# Altium PCB MSP432P401R_v1.0.PcbDoc
Units mil, origin at the board's own origin, x right, y up, seen from the top; angles counter-clockwise.
Board outline 3897.01 x 3280.59 mil, 2 copper layers (Top Layer, Bottom Layer); 47 components, 52 nets, 202 pads, 150 vias.
Unrouted connection lines stored in the file: 6.
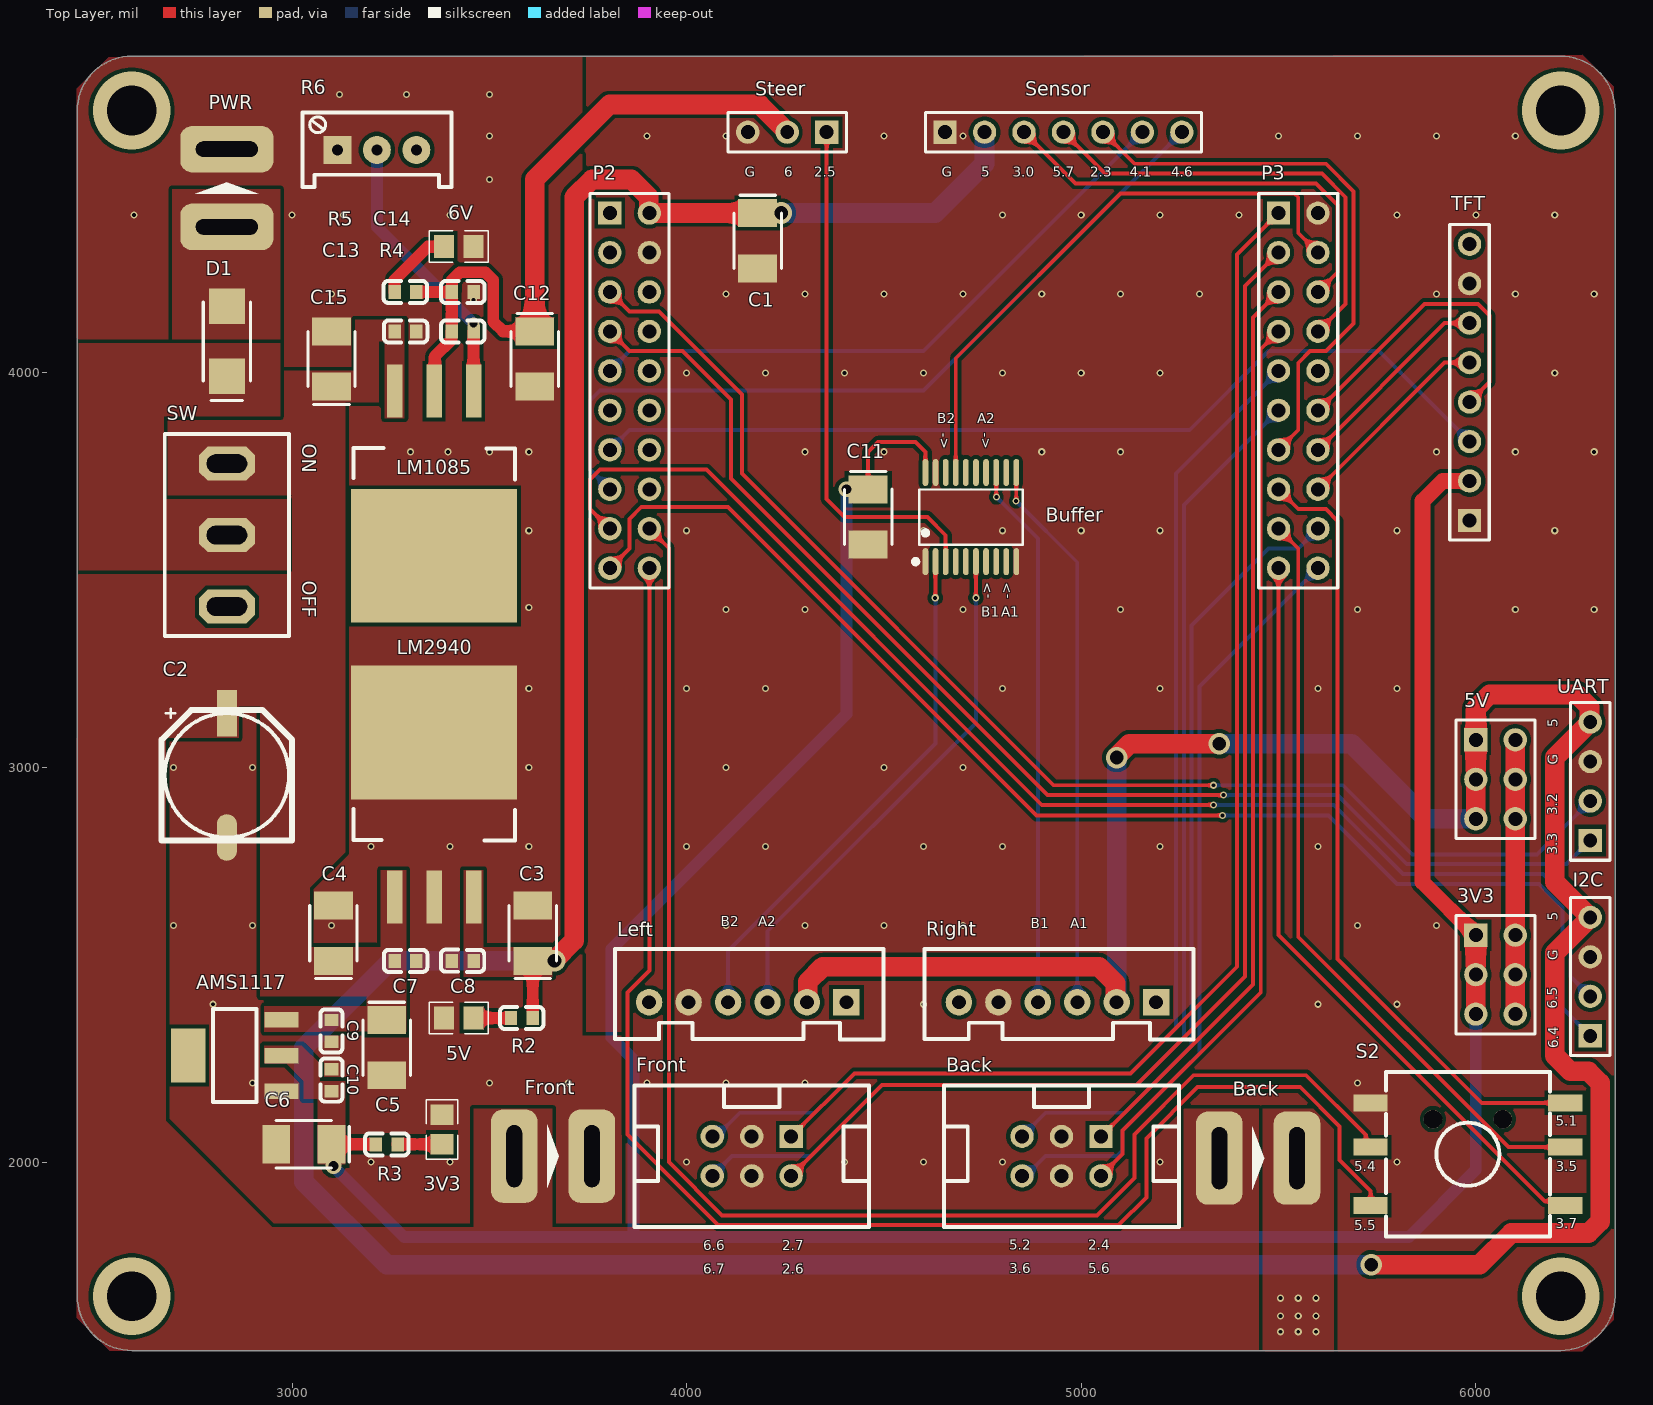
[diagram p0: Top Layer view]
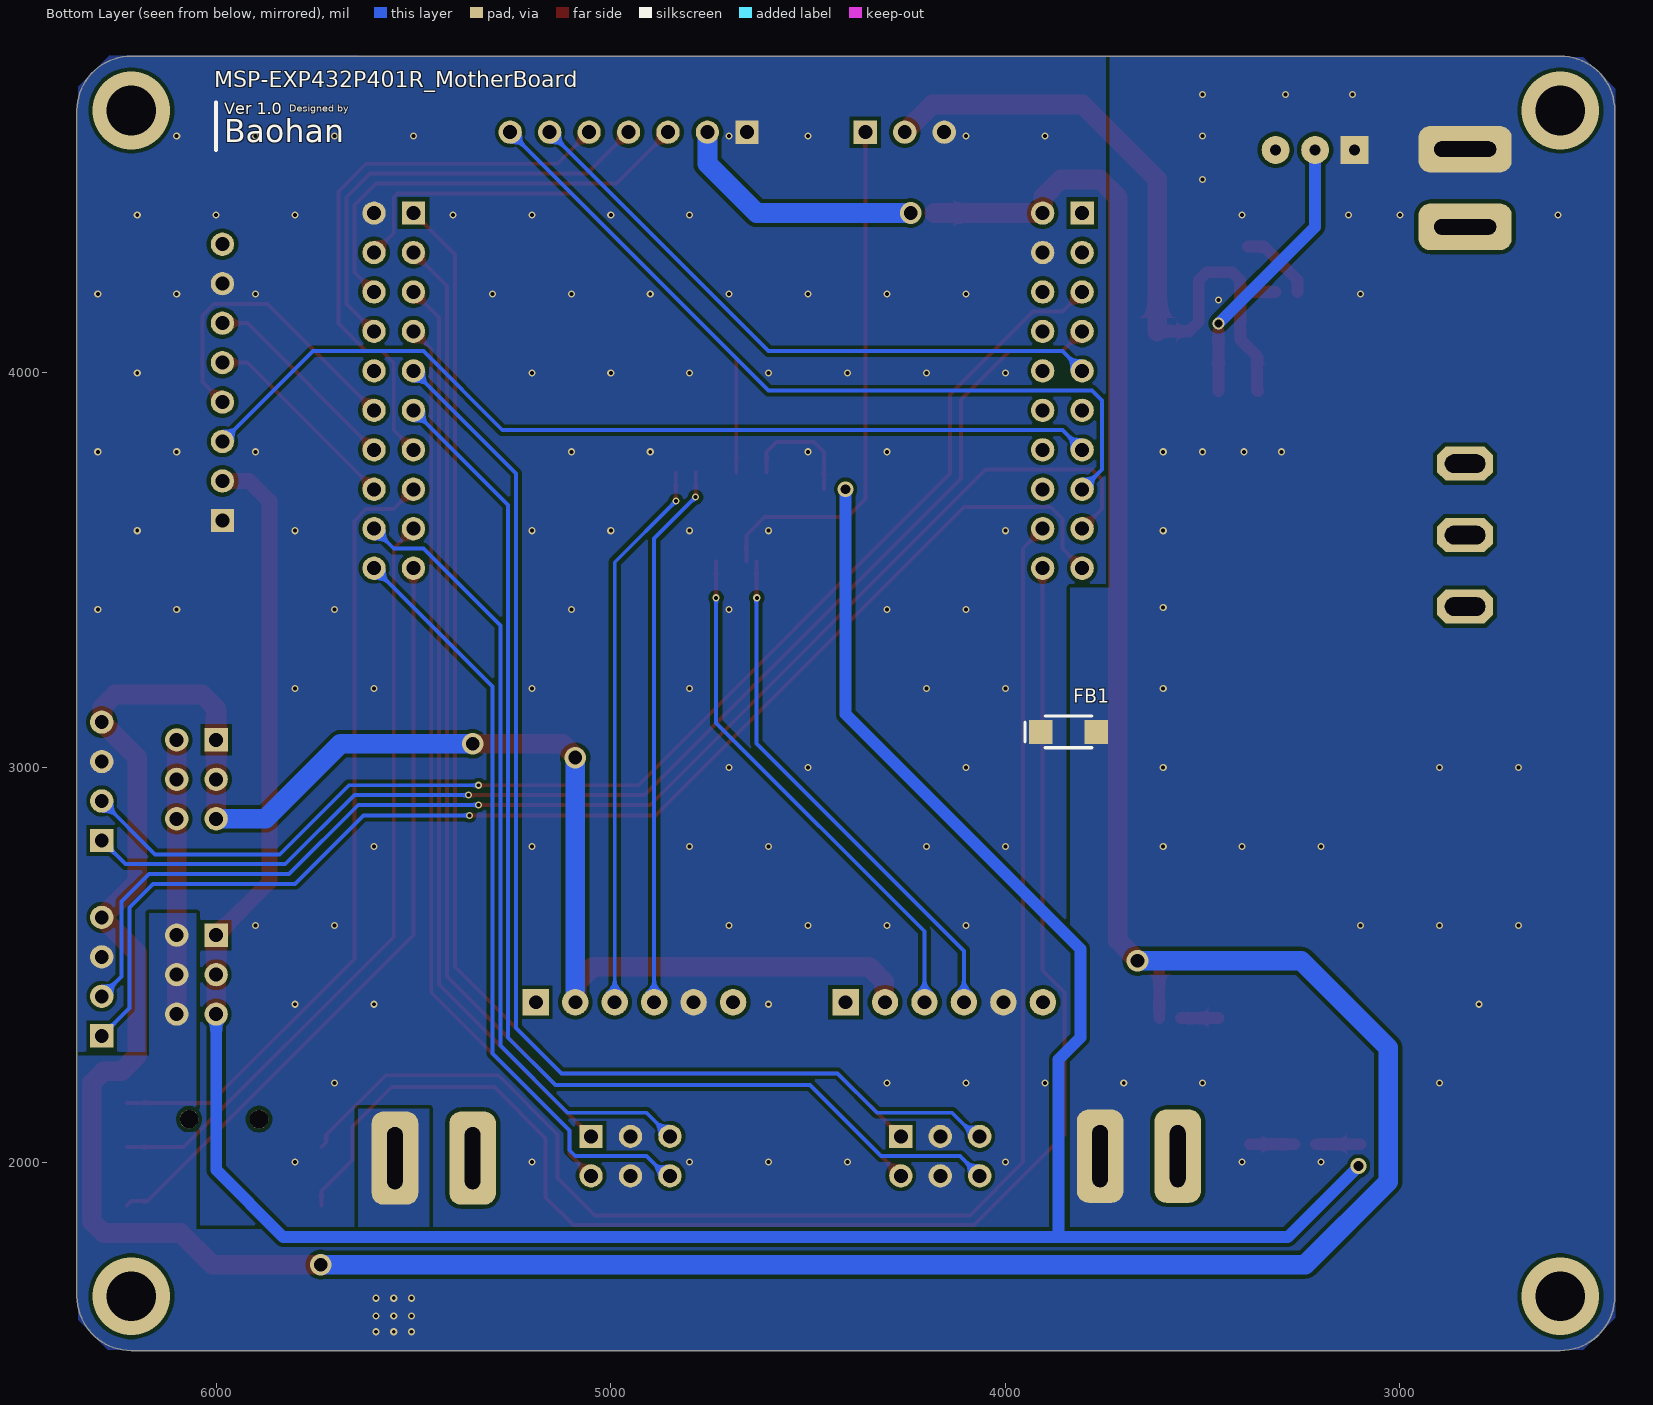
[diagram p1: Bottom Layer view, seen from below]

## Layer stack, top to bottom
Top Solder: solder mask 0.4, Solder Resist, Dk 3.5
Top Layer: signal copper 1.4
Dielectric 1: dielectric 12.6, FR-4, Dk 4.8
Bottom Layer: signal copper 1.4
Bottom Solder: solder mask 0.4, Solder Resist, Dk 3.5

## Board outline
2455.79,1660 ccw(c2593.58,1660) 2593.58,1522.2 6215,1522.2 ccw(c6215,1660) 6352.79,1660 6352.8,4665 ccw(c6215,4665) 6215,4802.8 2593.58,4802.8 ccw(c2593.58,4665) 2455.79,4665

## Design rules (kind name [scope] priority, off if disabled: settings)
Clearance [All] p1: gap=7 ignorepadtopadclearanceinfootprint=TRUE except(0: Arc-Hole Track-Hole SMDPad-Hole THPad-Hole Via-Hole Fill-Hole Poly-Hole Region-Hole Text-Hole; 10: Arc-Poly Track-Poly SMDPad-Poly THPad-Poly Via-Poly Fill-Poly Poly-Poly)
ComponentClearance [All] p1: gap=0 collisioncheckmode=3 verticalgap=0 showdistances=FALSE
HoleSize [All] p1: absolutevalues=TRUE maxlimit=10000 minlimit=8 maxpercent=80.000 minpercent=20.000
MinimumSolderMaskSliver [All] p1: minsoldermaskwidth=2
PlaneClearance [All] p1: clearance=8
PolygonConnect [All] p1: connectstyle=Direct reliefconductorwidth=10 reliefentries=4 polygonreliefangle="90 Angle" airgapwidth=10
RoutingVias [All] p1: holewidth=12 width=24 viastyle="Through Hole" minholewidth=12 minwidth=24 maxholewidth=12 maxwidth=24
ShortCircuit [All] p1 off: allowed=FALSE
SilkToSilkClearance [All] p1: silktosilkclearance=0
SilkToSolderMaskClearance [IsPad] p1: minsilkscreentomaskgap=0 clearancetoexposedcopper=TRUE
SolderMaskExpansion [All] p1: expansion=4 istentingtop=FALSE
Width VCC [InNetClass('VCC')] p1: maxlimit=160 minlimit=25 preferedwidth=30 minimp=50.000000 maximp=50.000000 favimp=50.000000
Width SIGN [InNetClass('SIGN')] p2: maxlimit=50 minlimit=5 preferedwidth=10 minimp=50.000000 maximp=50.000000 favimp=50.000000
23 further rules are at their usual default settings.

## Classes and differential pairs
component class Sheet1: 3V3 5V 6V AMS1117 Back Buffer C1 C2 C3 C4 C5 C6 C7 C8 C9 C10 C11 C12 C13 C14 C15 D1 FB1 Front I2C Left LM1085 LM2940 P2 P3 PWR R2 R3 R4 R5 R6 Right S2 SENSOR Steer SW TFT UART

## Components (designator, comment, footprint, x,y, rotation, side; value= is the part's Value field where it differs from the comment)
3V3 "LED" 0805 3380,2082.4 r90 top (schematic designator LED2)
3V3 "Header 3X2" HDR2X3 6000,2575 r270 top (schematic designator 2)
5V "LED" 0805 3422.6,2365 r180 top (schematic designator LED1)
5V "Header 3X2" HDR2X3 6000,3070 r270 top (schematic designator 1)
6V "LED" 0805 3422.4,4320 r0 top (schematic designator LED3)
AMS1117 "AMS117-3V3" SOT-223 2855,2270 r0 top (schematic designator U1)
Back "MOTOR" VCC_CON 5448.43,2010 r0 top (schematic designator P6)
Back "Header 3X2" 2x3牛角座 4950,2015 r0 top (schematic designator L1)
Buffer "Buffer" TSSOP_20 4720,3635 r0 top (schematic designator Buffer1)
C1 "25V" CAP-3528 4180,4335 r270 top value=10uF
C2 "Cap Pol" "CE E(8*10.2)" 2835,2980 r90 top value=470uF
C3 "Cap Pol2" CAP-3528 3610,2580 r90 top value=100uF
C4 "Cap Pol2" CAP-3528 3105,2580 r90 top value=100uF
C5 "Cap Pol2" CAP-3528 3240,2290 r270 top value=100uF
C6 "Cap Pol2" CAP-3528 3030,2045 r180 top value=100uF
C7 "Cap" CAP-0603 3287.55,2510 r180 top value=0.1uF
C8 "Cap" CAP-0603 3432.45,2510 r0 top value=0.1uF
C9 "Cap" CAP-0603 3100,2332.45 r90 top value=0.1uF
C10 "Cap" CAP-0603 3100,2207.55 r270 top value=0.1uF
C11 "25V" CAP-3528 4460,3635 r270 top value=10uF
C12 "Cap Pol2" CAP-3528 3615,4035 r270 top value=10uF
C13 "Cap" CAP-0603 3287.55,4105 r180 top value=0.1uF
C14 "Cap" CAP-0603 3432.55,4205 r180 top value=0.1uF
C15 "Cap Pol2" CAP-3528 3100,4035 r90 top value=10uF
D1 "D Schottky" DIODE-SMA 2835,4080 r270 top
FB1 "0R" CAP-1206 3840,3090 r180 bottom
Front "MOTOR" VCC_CON 3661.57,2015 r0 top (schematic designator P1)
Front "Header 3X2" 2x3牛角座 4165,2015 r0 top (schematic designator R1)
I2C "I2C" HDR1X4 6290,2320 r90 top (schematic designator AG1)
Left "Header 6" XH2.54-LI-6P 4155,2405 r180 top (schematic designator LEFT1)
LM1085 "LM1085" LM2940-5.0 3360,3745 r270 top (schematic designator U3)
LM2940 "LM2940-5V" LM2940-5.0 3360,2880 r90 top (schematic designator U2)
P2 "Header 10X2" HDR2X10 3805.51,4405 r270 top
P3 "Header 10X2" HDR2X10 5500,4405 r270 top
PWR "PWR" VCC_CON 2835,4468.43 r90 top (schematic designator P4)
R2 "Res2" RES_0603 3582.45,2365 r0 top value=5.1K
R3 "Res2" RES_0603 3240,2045 r180 top value=3K
R4 "330R" RES_0603 3432.44,4105 r180 top value=1K
R5 "Res2" RES_0603 3287.45,4205 r0 top value=5.1K
R6 "10K" 3296W 3215,4565 r0 top value=1K
Right "Header 6" XH2.54-LI-6P 4940,2405 r180 top (schematic designator RIGHT1)
S2 "五向开关" 五向按键（贴片） 5980,2020 r0 top
Sensor "Header 7" HDR1X7 4655,4610 r0 top (schematic designator P5)
Steer "舵机" HDR1X3 4355,4610 r180 top (schematic designator Steer1)
SW "SW-3-3" SWITCH-3-3 2835,3588.9 r270 top (schematic designator S1)
TFT "Component_1" HDR1X8 5984.06,3626.02 r90 top (schematic designator TFT1)
UART "UART" HDR1X4 6290,2815 r90 top (schematic designator CAM1)

## Footprints (in the part's own frame and the unit in brackets; to place one, negate y for a bottom-side part, rotate by r counter-clockwise, add the part's x,y. Pads: shape width x height; smd on the part's side, far side on the other; paste and mask are expansions set on the pad)
2x3牛角座 [mm]
  rect 1.5x1.5 hole 0.9: 1(2.54,1.27)
  round 1.5 hole 0.9: 2(2.54,-1.27) 3(0,1.27) 4(0,-1.27) 5(-2.54,1.27) 6(-2.54,-1.27)
  silkscreen extent -7.56,-4.55 7.56,4.55
0805 [mm] "贴片带丝印"
  rect 1.3x1.5 smd: 1(-0.95,0) 2(0.95,0)
  silkscreen extent -1.9,-1.02 1.91,1.02, body extent -1.14,-0.51 1.14,0.51, height 1
3296W [mm] "Precise Multi-Winding Adjustable Resistor"
  rect 1.8x1.8 hole 0.7: 1(-2.54,0)
  round 1.8 hole 0.7: 2(0,0) 3(2.54,0)
  silkscreen extent -4.8,-2.4 4.8,2.4, body extent -4.75,-2.4 4.75,2.4, height 2.9
CAP-0603 [mm] "0603封装电容"
  rect 0.8x0.9 smd: 1(-0.7,0) 2(0.7,0)
  silkscreen extent -1.41,-0.71 1.39,0.72, body extent -0.8,-0.41 0.8,0.41, height 0.84
CAP-1206 [mil]
  rect 60x60 smd: 1(-70,0) 2(70,0)
  silkscreen extent -110,-40 60,40, body extent -65,-35 65,35, height 39
CAP-3528 [mm]
  rect 1.8x2.5 smd: 1(-1.778,0) 2(1.778,0)
  silkscreen extent -2.92,-1.52 1.78,1.52, body extent -1.91,-1.4 1.91,1.4, height 1.1
"CE E(8*10.2)" [mm] "贴片电解电容，直径8mm，高10.2mm"
  rect 3x1.3 smd: 1(4,0)
  oval 3x1.3 smd: 2(-4,0)
  silkscreen extent -4.2,-4.2 4.3,4.2, body extent -4.5,-4.15 4.5,4.15, height 10.25
DIODE-SMA [mm]
  rect 2.3x2.3 smd: 1(-2.25,0) 2(2.25,0)
  silkscreen extent -2.54,-1.52 3.81,1.52, body extent -2.92,-1.4 2.92,1.4, height 3
HDR1X3 [mm] "Connector; Header; 3 Position"
  rect 1.5x1.5 hole 0.9: 1(0,0)
  round 1.5 hole 0.9: 2(2.54,0) 3(5.08,0)
  silkscreen extent -1.27,-1.27 6.35,1.27
HDR1X4 [mm] "Connector; Header; 4 Position"
  rect 1.5x1.5 hole 0.9: 1(0,0)
  round 1.5 hole 0.9: 2(2.54,0) 3(5.08,0) 4(7.62,0)
  silkscreen extent -1.27,-1.27 8.89,1.27
HDR1X7 [mm] "Connector; Header; 7 Position"
  rect 1.5x1.5 hole 0.9: 1(0,0)
  round 1.5 hole 0.9: 2(2.54,0) 3(5.08,0) 4(7.62,0) 5(10.16,0) 6(12.7,0) 7(15.24,0)
  silkscreen extent -1.27,-1.27 16.51,1.27
HDR1X8 [mm] "Connector; Header; 8 Position"
  rect 1.5x1.5 hole 0.9: 1(0,0)
  round 1.5 hole 0.9: 2(2.54,0) 3(5.08,0) 4(7.62,0) 5(10.16,0) 6(12.7,0) 7(15.24,0) 8(17.78,0)
  silkscreen extent -1.27,-1.27 19.05,1.27
HDR2X3 [mm] "Connector; Header; 3x2 Position"
  rect 1.5x1.5 hole 0.9: 1(0,0)
  round 1.5 hole 0.9: 2(0,2.54) 3(2.54,0) 4(2.54,2.54) 5(5.08,0) 6(5.08,2.54)
  silkscreen extent -1.27,-1.27 6.35,3.81
HDR2X10 [mm] "Connector; Header; 10x2 Position"
  rect 1.5x1.5 hole 0.9: 1(0,0)
  round 1.5 hole 0.9: 2(0,2.54) 3(2.54,0) 4(2.54,2.54) 5(5.08,0) 6(5.08,2.54) 7(7.62,0) 8(7.62,2.54) 9(10.16,0) 10(10.16,2.54) 11(12.7,0) 12(12.7,2.54) 13(15.24,0) 14(15.24,2.54) 15(17.78,0) 16(17.78,2.54) 17(20.32,0) 18(20.32,2.54) 19(22.86,0) 20(22.86,2.54)
  silkscreen extent -1.27,-1.27 24.13,3.81
LM2940-5.0 [mm]
  rect 3.4x1 smd: 1(-5.3,2.54) 2(-5.3,0) 3(-5.3,-2.54)
  rect 8.6x10.7 smd: 4(5.3,0)
  silkscreen extent -1.64,-5.2 0.38,5.2
RES_0603 [mm] "0603封装电阻"
  rect 0.8x0.9 smd: 1(-0.7,0) 2(0.7,0)
  silkscreen extent -1.41,-0.71 1.39,0.72, body extent -0.8,-0.4 0.8,0.4, height 0.45
SOT-223 [mm]
  rect 2.2x1 smd: 1(3,-2.3) 2(3,0) 3(3,2.3)
  rect 2.2x3.5 smd: 4(-3,0)
  silkscreen extent -1.4,-3 1.4,3, body extent -2.54,-2.54 2.54,2.54, height 1.27
SWITCH-3-3 [mm]
  oct 2.2x3.6 hole 1.2 slot 2.6 at 90 deg: 1(-4.6,0) 2(0,0) 3(4.6,0)
  silkscreen extent -6.5,-4 6.5,4
TSSOP_20 [mil]
  oval 14.33x68.58 smd mask+2: 1(-114.71,-113.42) 2(-89.12,-113.42) 3(-63.53,-113.42) 4(-37.94,-113.42) 5(-12.34,-113.42) 6(13.25,-113.42) 7(38.84,-113.42) 8(64.43,-113.42) 9(90.02,-113.42) 10(115.61,-113.42) 11(115.61,112.64) 12(90.02,112.64) 13(64.43,112.64) 14(38.84,112.64) 15(13.25,112.64) 16(-12.34,112.64) 17(-37.94,112.64) 18(-63.53,112.64) 19(-89.12,112.64) 20(-114.71,112.64)
  silkscreen extent -146,-119 131,69
VCC_CON [mm] "供电接口"
  rrect50% 3x6 hole 4 slot 1 at 0 deg: 1(-2.5,0) 2(2.5,0)
  silkscreen extent -0.38,-2.03 0.38,2.03
XH2.54-LI-6P [mm] "接插件，6P"
  rect 1.7x1.7 hole 0.9: 1(-6.35,0)
  round 1.7 hole 0.9: 2(-3.81,0) 3(-1.27,0) 4(1.27,0) 5(3.81,0) 6(6.35,0)
  silkscreen extent -8.74,-3.43 8.56,2.39, body extent -8.85,-3.3 8.85,2.4, height 7.05
五向按键（贴片） [mm] "6脚，长：10.5，宽：10，高：9mm"
  round 1.2 hole 1.2: 0(-2.25,2.25) 0(2.25,2.25)
  rect 2.2x1.1 smd: 1(-6.262,3.3) 2(-6.262,0.45) 3(-6.262,-3.3) 4(6.262,-3.3) 5(6.262,0.45) 6(6.262,3.3)
  silkscreen extent -5.29,-5.29 5.29,5.29, body extent -6.5,-5.16 6.5,5.16, height 0.15

## Part data
3V3 5V 6V: library part LED0, "Typical INFRARED GaAs LED", LatestRevisionDate=08-Jul-2005, LatestRevisionNote="Mech Layer 1 removed.", PackageDescription="LED; 2 Leads", PackageReference=LED-0, Published=8-Jun-2000, Publisher="Altium Limited"
3V3 5V Back Front: "Header, 3-Pin, Dual row", LatestRevisionDate=17-Jul-2002, LatestRevisionNote="Re-released for DXP Platform.", Publisher="Altium Limited"
AMS1117: library part AMS1117-3V3
Back Front PWR: library part "Header 2H", "Header, 2-Pin, Right Angle", LatestRevisionDate=17-Jul-2002, LatestRevisionNote="Re-released for DXP Platform.", Publisher="Altium Limited"
C1 C11: library part "Cap Pol2", "Polarized Capacitor (Axial)", LatestRevisionDate=17-Jul-2002, LatestRevisionNote="Re-released for DXP Platform.", PackageDescription="Polarized Capacitor; 2 Leads", PackageReference=POLAR0.8, Published=8-Jun-2000, Publisher="Altium Limited"
C2: "极性电解电容", LatestRevisionDate=17-Jul-2002, LatestRevisionNote="Re-released for DXP Platform.", PackageReference=RB7.6-15, Published=8-Jun-2000, Publisher="Altium Limited", Vol=16V
C3 C4 C5 C6 C12 C15: "Polarized Capacitor (Axial)", LatestRevisionDate=17-Jul-2002, LatestRevisionNote="Re-released for DXP Platform.", PackageDescription="Polarized Capacitor; 2 Leads", PackageReference=POLAR0.8, Published=8-Jun-2000, Publisher="Altium Limited"
C7 C8 C9 C10 C13 C14: "Capacitor", LatestRevisionDate=17-Jul-2002, LatestRevisionNote="Re-released for DXP Platform.", PackageDescription="Radial Cap, Thru-Hole; 2 Leads; 0.3 in Pin Spacing", PackageReference=RAD-0.3, Published=8-Jun-2000, Publisher="Altium Limited"
D1: "Schottky Diode", Code_JEDEC=DO-214-AA, LatestRevisionDate=17-Jul-2002, LatestRevisionNote="Re-released for DXP Platform.", PackageDescription="DO-214-AA/SMB; 2 C-Bend Leads; Body 5.3 x 3.6 mm, inc. leads (LxW)", PackageReference=SMB, Published=8-Jun-2000, Publisher="Altium Limited"
FB1: library part "Inductor Isolated", "Inductor Isolated六孔磁珠"
I2C: library part 12C
Left Right: "Header, 6-Pin", LatestRevisionDate=17-Jul-2002, LatestRevisionNote="Re-released for DXP Platform.", Publisher="Altium Limited"
LM2940: library part LM2940
P2 P3: "Header, 10-Pin, Dual row", LatestRevisionDate=17-Jul-2002, LatestRevisionNote="Re-released for DXP Platform.", Publisher="Altium Limited"
R2 R3 R5: "Resistor", LatestRevisionDate=17-Jul-2002, LatestRevisionNote="Re-released for DXP Platform.", PackageDescription="Axial Device, Thru-Hole; 2 Leads; 0.4 in Pin Spacing", PackageReference=AXIAL-0.4, Published=8-Jun-2000, Publisher="Altium Limited"
R4: library part Res2, "Resistor", LatestRevisionDate=17-Jul-2002, LatestRevisionNote="Re-released for DXP Platform.", PackageDescription="Axial Device, Thru-Hole; 2 Leads; 0.4 in Pin Spacing", PackageReference=AXIAL-0.4, Published=8-Jun-2000, Publisher="Altium Limited"
R6: library part "Res Adj2", "Variable Resistor", LatestRevisionDate=17-Jul-2002, LatestRevisionNote="Re-released for DXP Platform.", PackageDescription="Axial Device, Thru-Hole; 2 Leads; 0.6 in Pin Spacing", PackageReference=AXIAL-0.6, Published=8-Jun-2000, Publisher="Altium Limited", Set Position=0.5
Sensor: "Header, 7-Pin", LatestRevisionDate=17-Jul-2002, LatestRevisionNote="Re-released for DXP Platform.", Publisher="Altium Limited"
SW: library part SW-SPDT, "SPDT Subminiature Toggle Switch, Right Angle Mounting, Vertical Actuation", ComponentLink1Description="Manufacturer Link", ComponentLink1URL=http://www.apem.com, DatasheetVersion=05-Dec-2000, LatestRevisionDate=17-Dec-2003, LatestRevisionNote="Schematic revised, PCB Footprint replaced.", PackageDescription="Switch; 4 Leads", PackageReference=TL36WW15050, Published=24-Mar-1999, Publisher="Altium Limited"

## Via types
v1: diameter 18, hole 10, Top Layer to Bottom Layer, 138 vias
v2: diameter 55, hole 35, Top Layer to Bottom Layer, 5 vias
v3: diameter 196.85, hole 125.98, Top Layer to Bottom Layer, 4 vias
v4: diameter 40, hole 25, Top Layer to Bottom Layer, 2 vias
v5: diameter 30, hole 20, Top Layer to Bottom Layer, 1 vias

## Nets (pads, with @x,y where several pads share a name; then routed paths per layer and width w, separated by ;. In a path a pad name is that pad's centre, name@x,y a point inside that pad or via, vN(x,y) a via of type N, cw(c..) or ccw(c..) an arc to the next point about the centre after c; other vN are vias at no path point)
3V3: 3V3.1@6000,2575 3V3.3 3V3.5 AMS1117.2 Buffer.20 C6.1 C10.2 C11.1 R3.2 TFT.2 | length 7518.4
  Top Layer w10: C11.1 4460,3800 4485,3825 4580,3825 4605.29,3799.71 Buffer.20
  Top Layer w30: C6.1 R3.2
  Top Layer w40: TFT.2 5916.02,3726.02 5865,3675 5865,2710 3V3.1@6000,2575
  Top Layer w50: 3V3.5 3V3.3 3V3.1@6000,2575
  Bottom Layer w30: v4(3105,1990) 3285,1810 5830,1810 6000,1980 3V3.5 ; 3865,1812.57 3865,2260 3810,2315 3810,2540 4405,3135 v4(4405,3705)
5V: 5V.1@6000,3070 5V.3 5V.5 C1.1 C3.1 C8.2 I2C.4 Left.2 LM2940.3 P2.2 R2.2 Right.2 Sensor.2 UART.4 | length 12399.6
  Top Layer w30: R2.2 C3.1
  Top Layer w50: v2(3665,2510) 3665,2511.35 3715,2561.35 3715,4445 3760,4490 3860,4490 3903.78,4446.22 3903.78,4406.73 P2.2 C1.1 ; Left.2 4306.7,2406.7 4306.7,2456.7 4345,2495 5045,2495 5086.76,2453.24 5086.76,2408.24 Right.2 ; v2(5090,3025) 5090,3027.82 5122.18,3060 v2(5350,3060) ; v2(5735,1740) 6010,1740 6090,1820 6285.71,1820 6315,1849.29 6315,2200.71 6285.71,2230 6240,2230 6200,2270 6200,2530 I2C.4 6200,2710 6200,3025 UART.4 6288.27,3116.73 6288.27,3152.92 6256.18,3185 6035,3185 6000.06,3150.06 6000.06,3074.53 6000,3074.47 5V.3 5V.5
  Bottom Layer w50: v2(3665,2510) 3250,2510 3030,2290 3030,1950 3240,1740 v2(5735,1740) ; v2(4240,4405) 4630,4405 4755,4530 Sensor.2 ; Right.2 v2(5090,3025) ; v2(5350,3060) 5685,3060 5875,2870 5V.5
6V: C12.1 C14.2 LM1085.2 R4.2 R5.2 Steer.2 | length 1864.6
  Top Layer w30: R5.2 C14.2 ; LM1085.2 3361.96,3955.62 3361.96,4041.96 3404.14,4084.14 3404.14,4104.25 3405,4105.11 C14.2 ; C12.1 3535,4105 3510,4130 3510,4235 3490,4255 3425,4255 3405.75,4235.75 3405.75,4205.75 C14.2
  Top Layer w50: C12.1 3615,4490 3805,4680 4185,4680 Steer.2
7V2: AMS1117.3 Back.1@5350,2010 C2.1 C4.1 C5.1 C7.2 C9.2 C13.2 C15.1 Front.1@3563.15,2015 LM1085.3 LM2940.1 SW.1
A1: Buffer.11 Right.3 | length 1406.2
  Top Layer w10: v1(4835,3675) 4835.3,3675.3 4835.3,3747.33 Buffer.11
  Bottom Layer w10: v1@4835.61,3674.39 4990,3520 Right.3
A2: Buffer.6 Left.3 | length 1335.4
  Top Layer w10: v1(4733.25,3430) Buffer.6
  Bottom Layer w10: Left.3 4205,2585 4733.25,3113.25 v1(4733.25,3430)
B1: Buffer.13 Right.4 | length 1387.2
  Top Layer w10: Buffer.13 4784.71,3747.35 4784.71,3685.29 v1(4785,3685)
  Bottom Layer w10: v1@4784.43,3685.57 v1(4785,3685) 4890,3580 Right.4
B2: Buffer.2 Left.4 | length 1334.8
  Top Layer w10: v1(4630,3430) 4630.44,3430.44 4630.44,3521.14 Buffer.2
  Bottom Layer w10: Left.4 4105,2535 4630.88,3060.88 v1@4630.88,3430
BATGND: 3V3.2 3V3.4 3V3.6 5V.2 5V.4 5V.6 6V.2 AMS1117.1 Back.2@5546.85,2010 C2.2 C3.2 C4.2 C5.2 C6.2 C7.1 C8.1 C9.1 C10.1 C12.2 C13.1 C14.1 C15.2 FB1.2 Front.2@3760,2015 LM2940.2 LM2940.4 PWR.2 R6.1 | length 695
  Top Layer w50: 3V3.6 3V3.4 6100,2575 5V.6 5V.4 5V.2@6100,3070
  other v1: 5505,1570 5550,1570 5595,1570 5505,1610 5550,1610 5595,1610 5505,1655 5550,1655 5595,1655 3200,2000 3400,2000 2900,2200 3500,2200 3700,2200 2800,2400 2700,2600 2900,2600 3100,2600 3200,2800 3400,2800 3600,2800 2700,3000 2900,3000 3600,3000 3600,3200 3600,3405 3600,3600 3300,3800 3395,3800 3500,3800 3600,3800 3460,4185 3100,4200 2600,4400 3000,4400 3130,4400 3400,4400 3500,4490 3500,4600 3120,4705 3290,4705 3500,4705
GND: Back.3 Back.4 Buffer.1 Buffer.10 Buffer.19 C1.2 C11.2 FB1.1 Front.3 Front.4 I2C.3 Left.5 P2.4 P3.2 Right.5 S2.1 Sensor.1 Steer.3 TFT.1 TFT.7 UART.3
  other v1: 4000,2000 4400,2000 4600,2000 4800,2000 5200,2000 5800,2000 3900,2200 4100,2200 4300,2200 5700,2200 4600,2400 5600,2400 5800,2400 4100,2600 4300,2600 4500,2600 4700,2600 5700,2600 5900,2600 4000,2800 4200,2800 4600,2800 4800,2800 5200,2800 5600,2800 4100,3000 4500,3000 4700,3000 4000,3200 4200,3200 4800,3200 5200,3200 5600,3200 5800,3200 4100,3400 4300,3400 4700,3400 5100,3400 5700,3400 6100,3400 6300,3400 4000,3600 4600,3600 4800,3600 5000,3600 5200,3600 5800,3600 6200,3600 4300,3800 4500,3800 4900,3800 5100,3800 5900,3800 6100,3800 6300,3800 4000,4000 4200,4000 4400,4000 4600,4000 4800,4000 5000,4000 5200,4000 6200,4000 4100,4200 4300,4200 4500,4200 4700,4200 4900,4200 5100,4200 5300,4200 5900,4200 6100,4200 6300,4200 4800,4400 5000,4400 5200,4400 5400,4400 5800,4400 6000,4400 6200,4400 3900,4600 4100,4600 4500,4600 4700,4600 5500,4600 5700,4600 5900,4600 6100,4600
NetD1_2: D1.2 SW.2
NetLED1_1: 5V.1@3460,2365 R2.1 | length 94.9
  Top Layer w30: 5V.1@3460,2365 R2.1
NetLED2_1: 3V3.1@3380,2045 R3.1 | length 112.4
  Top Layer w30: R3.1 3V3.1@3380,2045
NetLED3_1: 6V.1 R5.1 | length 190.7
  Top Layer w30: R5.1@3259.95,4205.06 3259.95,4235.95 3344,4320 6V.1
NetR4_1: LM1085.1 R4.1 R6.2 | length 692.8
  Top Layer w30: LM1085.1 R4.1
  Bottom Layer w30: R6.2 3215,4370 v5(3460,4125)
P1.5: P2.13 TFT.3 | length 2376.9
  Bottom Layer w10: P2.13 3855.51,3855 5275,3855 5475,4055 5755.08,4055 TFT.3
P1.6: P3.12 TFT.4 | length 799.3
  Top Layer w10: P3.12 5870,4175 6005,4175 6035,4145 6035,3976.97 TFT.4
P1.7: P3.14 TFT.6 | length 517
  Top Layer w10: P3.14 5921.02,4126.02 TFT.6
P2.3: P3.13 Sensor.5 | length 1454.3
  Top Layer w10: Sensor.5 5135,4530 5620,4530 5690,4460 5690,4125 5620,4055 5580,4055 5550,4025 5550,3855 P3.13
P2.4: Back.1@5050,2065 P3.5 | length 2326.4
  Top Layer w10: Back.1@5050,2065 5435,2450 5435,4140 P3.5
P2.5: Buffer.17 P3.4 | length 1495.3
  Top Layer w10: Buffer.17 4682.06,4037.06 5100,4455 5540,4455 5550,4445 5550,4355 P3.4
P2.6: Front.2@4265,1965 P3.3 | length 3229.4
  Top Layer w10: Front.2@4265,1965 4495,2195 5140,2195 5415,2470 5415,4220 P3.3
P2.7: Front.1@4265,2065 P3.1 | length 3261.6
  Top Layer w10: Front.1@4265,2065 4425,2225 5125,2225 5395,2495 5395,4300 P3.1
P3.0: P3.6 Sensor.3 | length 1112.3
  Top Layer w10: Sensor.3 4985,4480 5595,4480 5650,4425 5650,4255 P3.6
P3.2: P2.5 UART.2 | length 3247.8
  Top Layer w10: P2.5 3855.51,4155 3930,4155 4140,3945 4140,3745 4930,2955 v1(5335,2955)
  Bottom Layer w10: v1(5335,2955) 5663.92,2955 5838.92,2780 6155,2780 UART.2
P3.3: P2.7 UART.1 | length 3185.7
  Top Layer w10: P2.7 3855.51,4055 3990,4055 4113,3932 4113,3732 4915,2930 v1(5360.43,2930)
  Bottom Layer w10: v1(5360.43,2930) 5650,2930 5825,2755 6230,2755 UART.1
P3.5: P3.17 S2.5 | length 1952.7
  Top Layer w10: P3.17 5550,3555 5550,2570 6082.28,2037.72 S2.5
P3.6: Back.6 P3.20 | length 1962
  Bottom Layer w10: Back.6 4860,1965 4910,2015 5090,2015 5105,2030 5105,2080 5300,2275 5300,3205 P3.20
P3.7: P3.19 S2.4 | length 1940.2
  Top Layer w10: P3.19 5500,2575 6174.09,1900.91 6215.7,1900.91 S2.4
P4.0: P2.8
P4.1: P2.9 Sensor.6 | length 1600.1
  Bottom Layer w10: P2.9 3855.51,4055 4600,4055 Sensor.6
P4.2: P2.10
P4.3: P2.11
P4.4: P2.12
P4.5: P2.14
P4.6: P2.15 Sensor.7 | length 2027.6
  Bottom Layer w10: P2.15 3755,3755.51 3755,3930 3780,3955 4600,3955 Sensor.7
P4.7: P2.16
P5.0: P3.16 TFT.5 | length 517
  Top Layer w10: P3.16 5921.02,4026.02 TFT.5
P5.1: P3.15 S2.6 | length 2020.9
  Top Layer w10: P3.15 5550,3655 5620,3655 5650,3625 5650,2515 6015.08,2149.92 S2.6
P5.2: Back.5 P3.18 | length 2011.8
  Bottom Layer w10: Back.5 4910,2125 5110,2125 5280,2295 5280,3360 5475,3555 5550,3555 P3.18
P5.4: P2.18 S2.2 | length 3757.9
  Top Layer w10: P2.18 3955,3555.51 3955,2000 4090,1865 5040,1865 5135,1960 5135,2070 5285,2220 5570,2220 5721.49,2068.51 5721.49,2049.69 S2.2
P5.5: P2.20 S2.3 | length 3864.9
  Top Layer w10: P2.20 3905.51,2485.51 3850,2430 3850,2070 4080,1840 5095,1840 5165,1910 5165,2060 5295,2190 5555,2190 5655,2090 5655,2005 5733.46,1926.54 S2.3
P5.6: Back.2@5050,1965 P3.7 | length 2326.4
  Top Layer w10: Back.2@5050,1965 5105,2020 5105,2080 5455,2430 5455,4060 P3.7
P5.7: P3.8 Sensor.4 | length 1152.3
  Top Layer w10: Sensor.4 5060,4505 5610,4505 5670,4445 5670,4175 P3.8
P6.0: P2.3
P6.1: P2.6
P6.4: I2C.1 P2.19 | length 3297.3
  Top Layer w10: P2.19 3855,3554.49 3855,3630 3885,3660 4105,3660 4886.65,2878.35 v1(5358.35,2878.35)
  Bottom Layer w10: v1(5358.35,2878.35) 5626.65,2878.35 5800,2705 6160,2705 6220,2645 6220,2390 I2C.1
P6.5: I2C.2 P2.17 | length 3355.6
  Top Layer w10: P2.17 3755,3655.51 3755,3730 3780,3755 4050,3755 4900,2905 v1(5335,2905)
  Bottom Layer w10: v1(5335,2905) 5640,2905 5815,2730 6170,2730 6240,2660 6240,2470 I2C.2
P6.6: Front.5 P3.9 | length 3061.6
  Bottom Layer w10: Front.5 4075,2065 4135,2125 4325,2125 4425,2225 5125,2225 5240,2340 5240,3745 P3.9
P6.7: Front.6 P3.11 | length 3029.4
  Bottom Layer w10: Front.6 4115,2015 4315,2015 4495,2195 5140,2195 5260,2315 5260,3665 P3.11
STEER: Buffer.3 Steer.1 | length 1336.3
  Top Layer w10: Steer.1 4355,3680 4400,3635 4610,3635 4656.47,3588.53 Buffer.3
VCC: D1.1 PWR.1
pads on no net: AMS1117.4 Buffer.4 Buffer.5 Buffer.7 Buffer.8 Buffer.9 Buffer.12 Buffer.14 Buffer.15 Buffer.16 Buffer.18 Left.1 Left.6 LM1085.4 P2.1 P3.10 R6.3 Right.1 Right.6 S2.0 SW.3 TFT.8
copper on no net:
  other v3: 2593.58,1660 6215,1660 2593.58,4665 6215,4665

## Polygon pours and split planes (outlines as drawn)
GND on Top Layer "GND_L01_P013" (solid, pour order 13): 3734.75,4800.57 3739.75,4795.57 3739.75,1520.57 6269.75,1520.57 6349.75,1600.57 6349.75,4725.57 6269.68,4805.64
BATGND on Top Layer "BATGND_L01_P011" (solid, pour order 11): 5460,2135 5640,2135 5640,1520 5460,1520
BATGND on Top Layer "BATGND_L01_P008" (solid, pour order 8): 3835,2320 3835,1845 3660,1845 3660,2135 3460,2135 3460,1835 2950,1835 2680,2105 2680,3155 3135,3155 3135,4000 3130,4005 2980.2,4005 2980.2,4454.8 2970,4465 2696.42,4465 2696.42,4085 2455,4085 2455,4720 2535,4800 3735,4800 3735,2320
7V2 on Top Layer "7V2_L01_P003" (solid, pour order 3): 2920,2420 3190,2420 3190,2395 2930,2395 2930,2330 3185,2330 3290,2330 3290,2740 3225,2740 3225,2545 3045,2545 3045,2695 3135,2785 3135,3925 3220,3925 3220,4080 3235,4080 3235,3885 3285,3885 3285,4135 3160,4135 3160,4005 2970,4005 2970,3890 2675,3890 2675,3690 3000,3690 2995,3685 2995,3490 2455.79,3490 2455.79,3075 2455,3074.21 2455,1605 2537.8,1522.2 5450,1522.2 5450,2135 5260,2135 5260,1835 3660,1835 3660,2135 3460,2135 3460,1835 2950,1835 2680,2105 2680,3075 2865,3075 2865,3155 2920,3155
3V3 on Top Layer "3V3_L01_P006" (solid, pour order 6): 2930,2295 2930,2250 2985,2250 3030,2205 3030,2160 3065,2160 3065,1995 3135,1995 3135,2205 3070,2205 3070,2250 3025,2295
5V on Top Layer "5V_L01_P005" (solid, pour order 5): 3435,2740 3435,2470 3660,2470 3660,2545 3485,2545 3485,2740
NetD1_2 on Top Layer "NETD1_2_L01_P001" (solid, pour order 1): 2970,4075 2970,3890 2675,3890 2675,3680 2990,3680 2990,3500 2460,3500 2460,4075
VCC on Top Layer "VCC_L01_P000" (solid, pour order 0): 2696.42,4465 2696.42,4085 2970,4085 2970,4465
GND on Bottom Layer "GND_L02_P012" (solid, pour order 12): 3735,4800 3740,4795 3740,1520 6270,1520 6350,1600 6350,4725 6269.93,4805.07
BATGND on Bottom Layer "BATGND_L02_P007" (solid, pour order 7): 6170,2270 6350,2270 6350,1600 6275,1525 2535,1525 2455,1605 2455,4720 2535,4800 3735,4800 3735,3455 3835,3455 3835,1835 5460,1835 5460,2135 5640,2135 5640,1830 6050,1830 6050,2630 6170,2630

## Silkscreen, mask and mechanical layers (free items; w line width, h text height)
Top Overlay:
  text "G" at 4147,4497 h25
  text "6" at 4247,4497 h25
  text "2.5" at 4323.19,4496.67 h25
  text "G" at 4647,4497 h25
  text "5" at 4747,4497 h25
  text "3.0" at 4827,4497 h25
  text "5.7" at 4928.19,4496.67 h25
  text "2.3" at 5023.19,4496.67 h25
  text "4.1" at 5123.19,4496.67 h25
  text "4.6" at 5228.19,4496.67 h25
  text "B2" at 4634.95,3872.54 h25
  text "A2" at 4737,3872 h25
  text "->" at 4642,3848 h25 r270
  text "->" at 4747,3848 h25 r270
  text "ON                  OFF" at 3015,3820 h60 r270
  text "->" at 4773,3427 h25 r90
  text "->" at 4823,3427 h25 r90
  text "B1" at 4747,3382 h25
  text "A1" at 4797,3382 h25
  text "5" at 6208,3102 h25 r90
  text "G" at 6208,3007 h25 r90
  text "3.2" at 6206.74,2879.14 h25 r90
  text "3.3" at 6206.74,2779.14 h25 r90
  text "5" at 6208,2612 h25 r90
  text "B2" at 4087,2597 h25
  text "A2" at 4182,2597 h25
  text "B1" at 4872,2592 h25
  text "A1" at 4972,2592 h25
  text "G" at 6208,2512 h25 r90
  text "6.5" at 6206.74,2389.14 h25 r90
  text "6.4" at 6208.33,2288.19 h25 r90
  text "5.1" at 6202,2092 h25
  text "5.4" at 5692,1977 h25
  text "3.5" at 6202,1977 h25
  text "3.7" at 6202,1832 h25
  text "5.5" at 5692,1827 h25
  text "5.2" at 4817.26,1778.24 h25
  text "2.4" at 5017.26,1778.24 h25
  text "6.6" at 4042,1777 h25
  text "2.7" at 4242,1777 h25
  text "3.6" at 4817.26,1718.24 h25
  text "5.6" at 5017.26,1718.24 h25
  text "6.7" at 4042,1717 h25
  text "2.6" at 4242,1717 h25
Bottom Overlay:
  lines w10: 6000,4565 6000,4685
  text "MSP-EXP432P401R_MotherBoard" at 6005,4710 h70
  text "Designed by" at 5815,4655 h30
  text "Ver 1.0" at 5980,4645 h50
  text "Baohan" at 5980,4565 h100
Mechanical 1:
  lines w10: 6215,1522.2 ccw(c6215,1660) 6352.79,1660 6352.8,4665 ccw(c6215,4665) 6215,4802.8 ; 6215.63,1522.2 2593.58,1522.2 cw(c2593.58,1660) 2455.79,1660 2455.79,4665 cw(c2593.58,4665) 2593.58,4802.8 6215.63,4802.8